# EAGLE board PanBatBoostAAA (EAGLE 7.0.0)
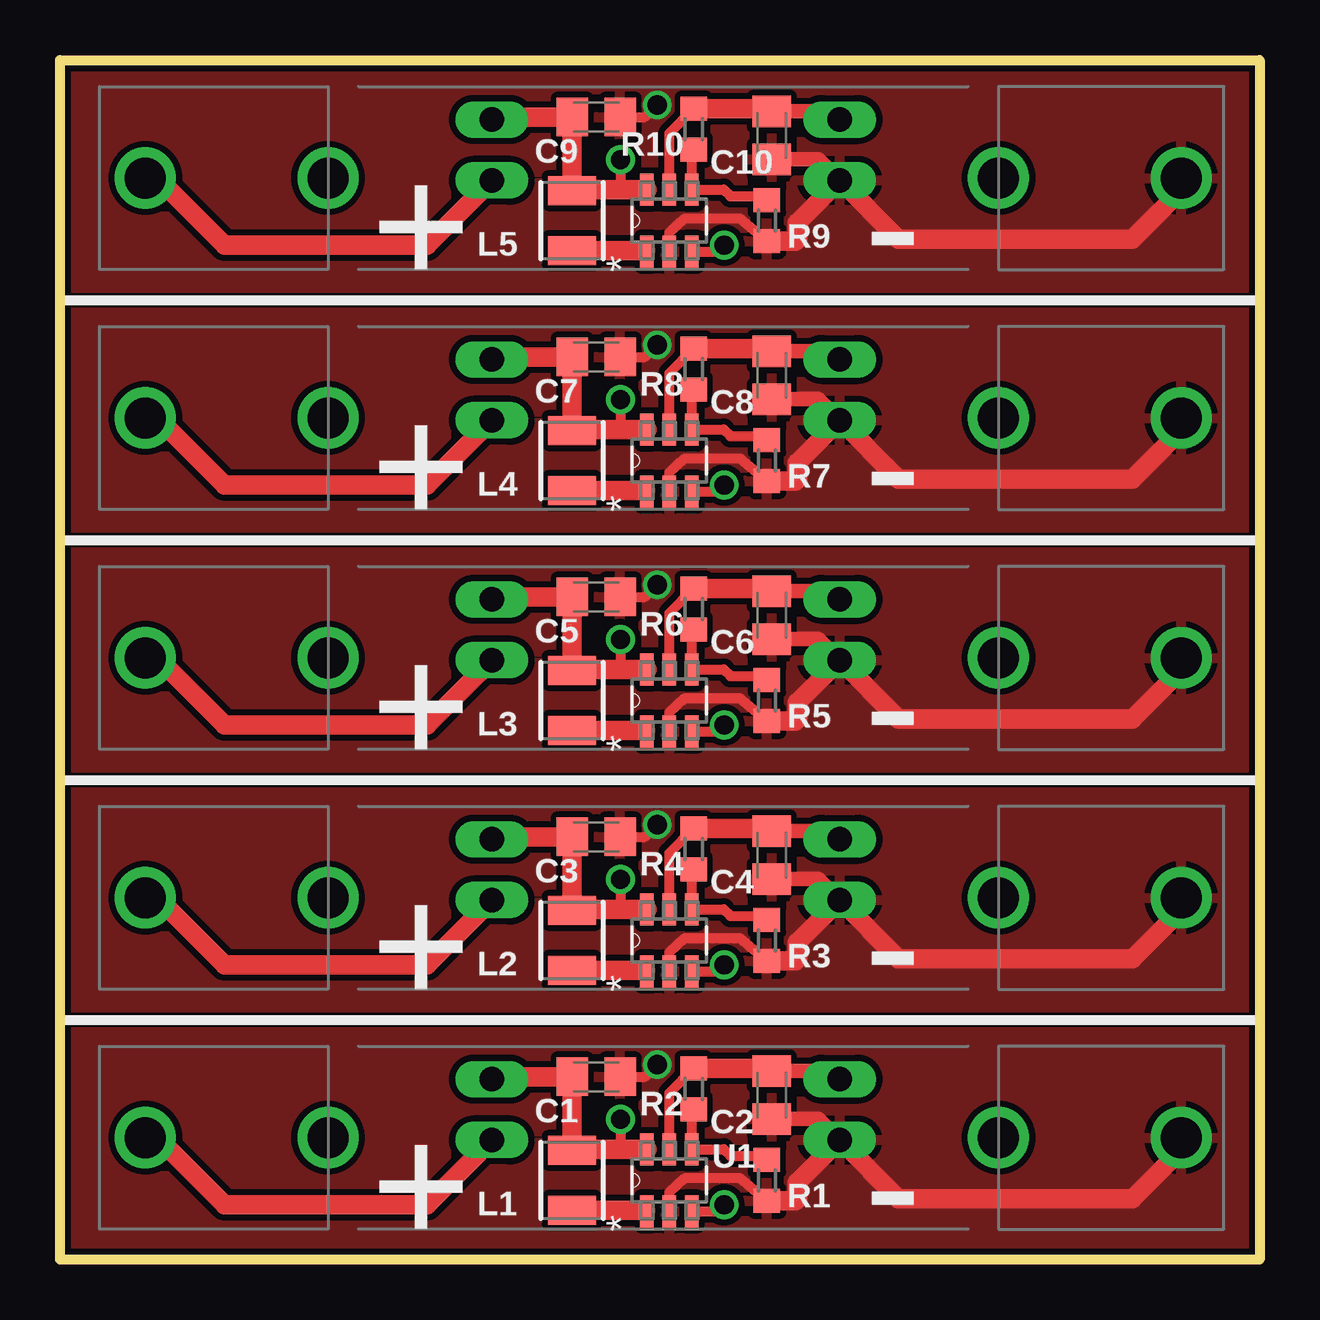
[diagram p0: board, top side]
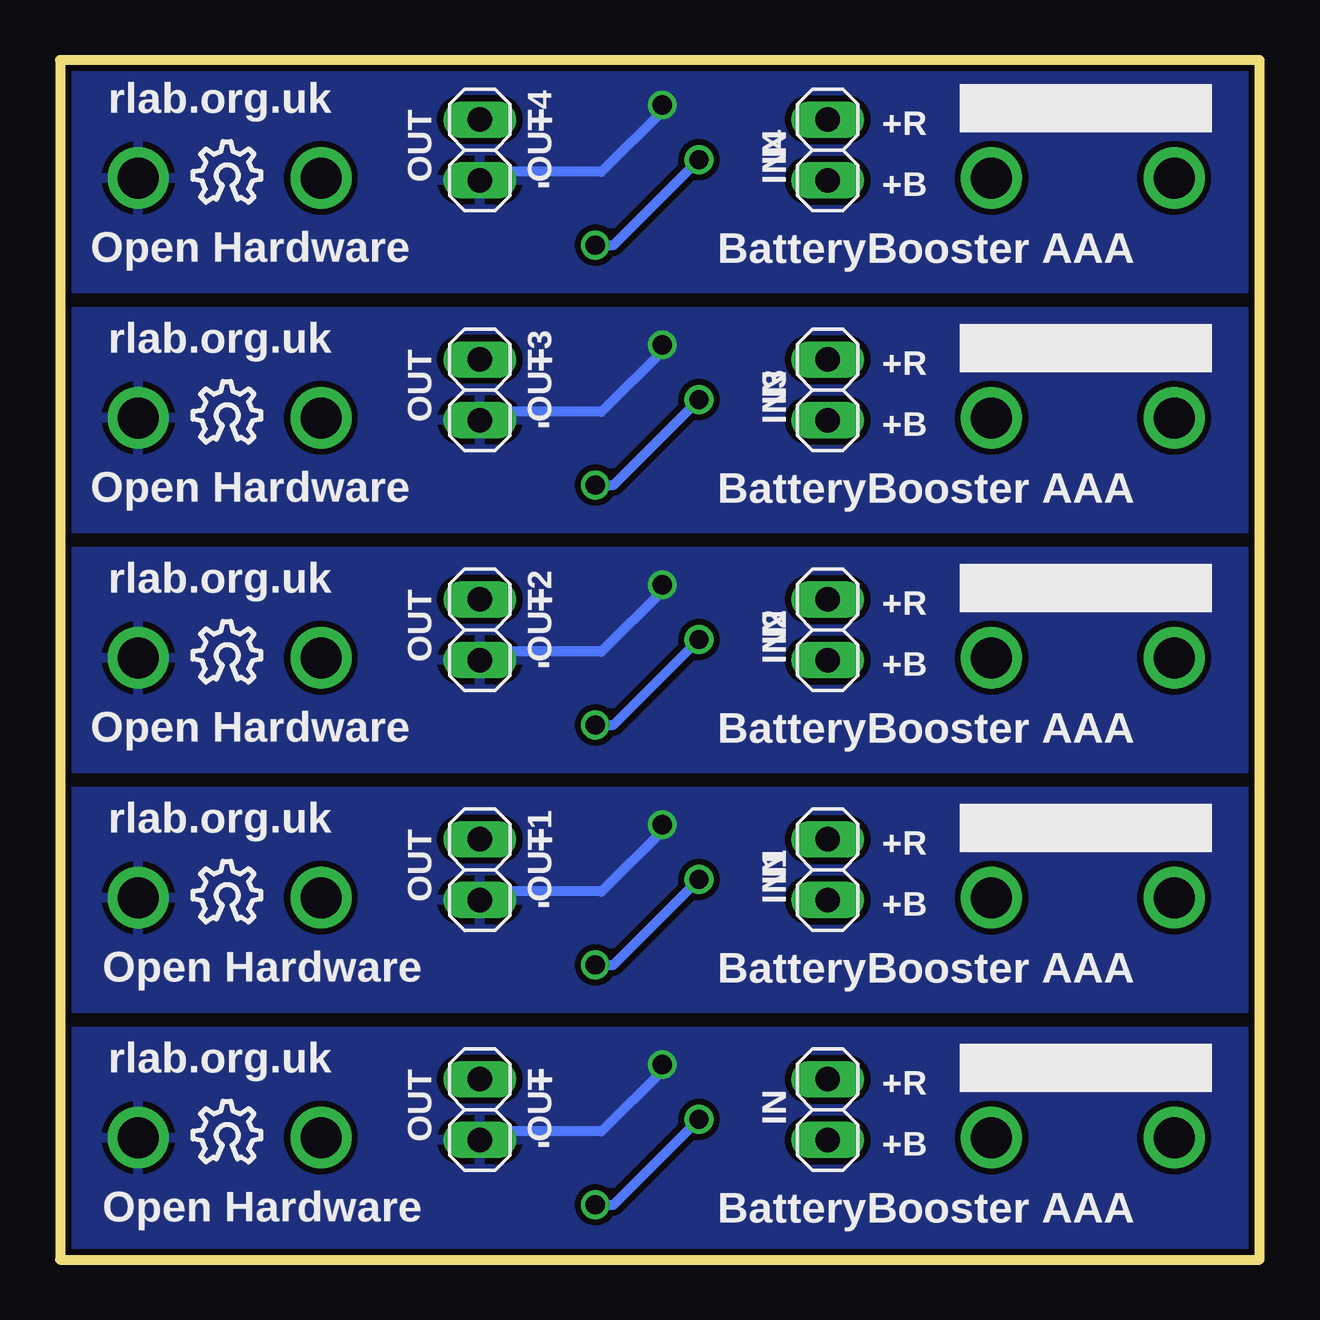
[diagram p1: board, bottom side, seen from below]

Size 50 x 50 mm. Coordinates in mm from the lower left corner, seen from the top.
Outline: 50,0 0,0 0,50 50,50 50,0
Copper layers (1*16): Top 0.035mm / dielectric 1.5mm / Bottom 0.035mm
Design rules "dirt_cheap_dirty_boards.v1 *": minimum track width 5mil, minimum drill 12mil, track to track 10mil, track to pad 10mil, pad to pad 10mil, via to via 10mil, smd to smd 0mil, copper to edge 10mil, drill to drill 10mil, minimum pad ring 10mil, minimum via ring 6mil, stop-mask expansion 2mil, vias tented up to drill 25mil, thermal gap 10mil

## Footprints (pad centres in the part's own frame; a part is rotated, then mirrored left to right if it is on the bottom)
BATTERY-AAA = drill 1.702: GND@1 21.59,0; GND@2 13.97,0; PWR@1 -21.59,0; PWR@2 -13.97,0
C0805K = smd 1.3 x 1.6: 1 -1,0; 2 1,0
1X02 = drill 1.016 long: 1 -1.27,0; 2 1.27,0
LQH32 = smd 1.2 x 2: 1 -1.25,0; 2 1.25,0
R0603 = smd 1 x 1.1: 1 -0.85,0; 2 0.85,0
SOT95P270X145-6N = smd 1.321 x 0.559: 1 -1.295,0.94; 2 -1.295,0; 3 -1.295,-0.94; 4 1.295,-0.94; 5 1.295,0; 6 1.295,0.94

## Placement (x,y rotation side)
BAT1  [BATTERY-AAA]  25.15,5.08 0 top
BAT2  [BATTERY-AAA]  25.15,15.08 0 top
BAT3  [BATTERY-AAA]  25.15,25.08 0 top
BAT4  [BATTERY-AAA]  25.15,35.08 0 top
BAT5  [BATTERY-AAA]  25.15,45.08 0 top
C1  [C0805K]  22.35,7.62 0 top
C2  [C0805K]  29.67,6.86 270 top
C3  [C0805K]  22.35,17.62 0 top
C4  [C0805K]  29.67,16.86 270 top
C5  [C0805K]  22.35,27.62 0 top
C6  [C0805K]  29.67,26.86 270 top
C7  [C0805K]  22.35,37.62 0 top
C8  [C0805K]  29.67,36.86 270 top
C9  [C0805K]  22.35,47.62 0 top
C10  [C0805K]  29.67,46.86 270 top
IN  [1X02]  18,6.25 270 bottom
IN1  [1X02]  18,16.25 270 bottom
IN2  [1X02]  18,26.25 270 bottom
IN3  [1X02]  18,36.25 270 bottom
IN4  [1X02]  18,46.25 270 bottom
L1  [LQH32]  21.34,3.3 270 top
L2  [LQH32]  21.34,13.3 270 top
L3  [LQH32]  21.34,23.3 270 top
L4  [LQH32]  21.34,33.3 270 top
L5  [LQH32]  21.34,43.3 270 top
OUT  [1X02]  32.5,6.25 90 bottom
OUT1  [1X02]  32.5,16.25 90 bottom
OUT2  [1X02]  32.5,26.25 90 bottom
OUT3  [1X02]  32.5,36.25 90 bottom
OUT4  [1X02]  32.5,46.25 90 bottom
R1  [R0603]  29.46,3.3 90 top
R2  [R0603]  26.42,7.11 90 top
R3  [R0603]  29.46,13.3 90 top
R4  [R0603]  26.42,17.11 90 top
R5  [R0603]  29.46,23.3 90 top
R6  [R0603]  26.42,27.11 90 top
R7  [R0603]  29.46,33.3 90 top
R8  [R0603]  26.42,37.11 90 top
R9  [R0603]  29.46,43.3 90 top
R10  [R0603]  26.42,47.11 90 top
U$1  MCP1640CT-I/CHY  [SOT95P270X145-6N]  25.4,3.3 90 top
U$2  [OSHW_8X100_NOTEXT]  44.45,4.06 0 bottom
U$3  MCP1640CT-I/CHY  [SOT95P270X145-6N]  25.4,13.3 90 top
U$4  [OSHW_8X100_NOTEXT]  44.45,14.06 0 bottom
U$5  MCP1640CT-I/CHY  [SOT95P270X145-6N]  25.4,23.3 90 top
U$6  [OSHW_8X100_NOTEXT]  44.45,24.06 0 bottom
U$7  MCP1640CT-I/CHY  [SOT95P270X145-6N]  25.4,33.3 90 top
U$8  [OSHW_8X100_NOTEXT]  44.45,34.06 0 bottom
U$9  MCP1640CT-I/CHY  [SOT95P270X145-6N]  25.4,43.3 90 top
U$10  [OSHW_8X100_NOTEXT]  44.45,44.06 0 bottom

## Library data of the parts
BAT1-BAT5 = SparkFun
C1-C10 R1-R10 = rcl
IN IN1-IN4 OUT OUT1-OUT4 = pinhead
L1-L5 = inductor
U$1 U$3 U$5 U$7 U$9 = MCP1640; MPN: MCP1640CT-I/CHY; OC_FARNELL: 1800208; OC_NEWARK: 73R3626; PACKAGE: SOT-6; SUPPLIER: Microchip
U$2 U$4 U$6 U$8 U$10 = ohw-logo

## Nets
GND: BAT1.GND@1 C1.2 C2.2 OUT.1 R1.1 U$1.2
GND1: BAT2.GND@1 C3.2 C4.2 OUT1.1 R3.1 U$3.2
GND2: BAT3.GND@1 C5.2 C6.2 OUT2.1 R5.1 U$5.2
GND3: BAT4.GND@1 C7.2 C8.2 OUT3.1 R7.1 U$7.2
GND4: BAT5.GND@1 C9.2 C10.2 OUT4.1 R9.1 U$9.2
N$1: C1.1 IN.1 L1.1 U$1.3 U$1.6
N$2: C2.1 OUT.2 R2.2 U$1.5
N$3: R1.2 R2.1 U$1.4
N$4: L1.2 U$1.1
N$5: BAT1.PWR@1 IN.2
N$6: C4.1 OUT1.2 R4.2 U$3.5
N$7: R3.2 R4.1 U$3.4
N$8: BAT2.PWR@1 IN1.2
N$9: C3.1 IN1.1 L2.1 U$3.3 U$3.6
N$10: L2.2 U$3.1
N$11: C6.1 OUT2.2 R6.2 U$5.5
N$12: R5.2 R6.1 U$5.4
N$13: BAT3.PWR@1 IN2.2
N$14: C5.1 IN2.1 L3.1 U$5.3 U$5.6
N$15: L3.2 U$5.1
N$16: C8.1 OUT3.2 R8.2 U$7.5
N$17: R7.2 R8.1 U$7.4
N$18: BAT4.PWR@1 IN3.2
N$19: C7.1 IN3.1 L4.1 U$7.3 U$7.6
N$20: L4.2 U$7.1
N$21: C10.1 OUT4.2 R10.2 U$9.5
N$22: R9.2 R10.1 U$9.4
N$23: BAT5.PWR@1 IN4.2
N$24: C9.1 IN4.1 L5.1 U$9.3 U$9.6
N$25: L5.2 U$9.1

## Tracks (layer width: path | path; a pad name or v marks a point on that pad's centre or on a via)
GND  (via drill 0.8)
  Top 0.406: 29.88,2.45 R1.1 28.34,3.4 26.06,3.4 25.4,2.79 U$1.2 | C2.2 29.46,5.84 | C1.2 24.38,7.62 v24.89,8.13
  Top 0.61: C2.2 31.62,5.86 OUT.1
  Top 0.813: 29.88,2.45 30.65,2.45 30.73,2.54 30.73,3.21 OUT.1 34.94,2.54 44.7,2.54 46.74,4.57 BAT1.GND@1
  Bottom 0.406: v24.89,8.13 24.89,7.87 27.43,5.33 32.15,5.33 OUT.1
  pour Bottom: 0.5,0.5 0.5,9.5 49.5,9.5 49.5,0.5
  pour Top: 0.5,0.5 0.5,9.5 49.5,9.5 49.5,0.5
GND1  (via drill 0.8)
  Top 0.406: 29.88,12.45 R3.1 28.34,13.4 26.06,13.4 25.4,12.79 U$3.2 | C4.2 29.46,15.84 | C3.2 24.38,17.62 v24.89,18.13
  Top 0.61: C4.2 31.62,15.86 OUT1.1
  Top 0.813: 29.88,12.45 30.65,12.45 30.73,12.54 30.73,13.21 OUT1.1 34.94,12.54 44.7,12.54 46.74,14.57 BAT2.GND@1
  Bottom 0.406: v24.89,18.13 24.89,17.87 27.43,15.33 32.15,15.33 OUT1.1
  pour Bottom: 0.5,10.5 0.5,19.5 49.5,19.5 49.5,10.5
  pour Top: 0.5,10.5 0.5,19.5 49.5,19.5 49.5,10.5
GND2  (via drill 0.8)
  Top 0.406: 29.88,22.45 R5.1 28.34,23.4 26.06,23.4 25.4,22.79 U$5.2 | C6.2 29.46,25.84 | C5.2 24.38,27.62 v24.89,28.13
  Top 0.61: C6.2 31.62,25.86 OUT2.1
  Top 0.813: 29.88,22.45 30.65,22.45 30.73,22.54 30.73,23.21 OUT2.1 34.94,22.54 44.7,22.54 46.74,24.57 BAT3.GND@1
  Bottom 0.406: v24.89,28.13 24.89,27.87 27.43,25.33 32.15,25.33 OUT2.1
  pour Bottom: 0.5,20.5 0.5,29.5 49.5,29.5 49.5,20.5
  pour Top: 0.5,20.5 0.5,29.5 49.5,29.5 49.5,20.5
GND3  (via drill 0.8)
  Top 0.406: 29.88,32.45 R7.1 28.34,33.4 26.06,33.4 25.4,32.79 U$7.2 | C8.2 29.46,35.84 | C7.2 24.38,37.62 v24.89,38.13
  Top 0.61: C8.2 31.62,35.86 OUT3.1
  Top 0.813: 29.88,32.45 30.65,32.45 30.73,32.54 30.73,33.21 OUT3.1 34.94,32.54 44.7,32.54 46.74,34.57 BAT4.GND@1
  Bottom 0.406: v24.89,38.13 24.89,37.87 27.43,35.33 32.15,35.33 OUT3.1
  pour Bottom: 0.5,30.5 0.5,39.5 49.5,39.5 49.5,30.5
  pour Top: 0.5,30.5 0.5,39.5 49.5,39.5 49.5,30.5
GND4  (via drill 0.8)
  Top 0.406: 29.88,42.45 R9.1 28.34,43.4 26.06,43.4 25.4,42.79 U$9.2 | C10.2 29.46,45.84 | C9.2 24.38,47.62 v24.89,48.13
  Top 0.61: C10.2 31.62,45.86 OUT4.1
  Top 0.813: 29.88,42.45 30.65,42.45 30.73,42.54 30.73,43.21 OUT4.1 34.94,42.54 44.7,42.54 46.74,44.57 BAT5.GND@1
  Bottom 0.406: v24.89,48.13 24.89,47.87 27.43,45.33 32.15,45.33 OUT4.1
  pour Bottom: 0.5,40.5 0.5,49.5 49.5,49.5 49.5,40.5
  pour Top: 0.5,40.5 0.5,49.5 49.5,49.5 49.5,40.5
N$1  (via drill 0.8)
  Top 0.406: U$1.3 27.41,2.01 v27.69,2.29 | v23.37,5.84 23.37,4.85 23.11,4.6
  Top 0.813: U$1.6 23.11,4.6 21.38,4.6 L1.1 21.34,7.6 C1.1 18.1,7.62 IN.1
  Bottom 0.406: v27.69,2.29 26.92,2.29 v23.37,5.84
N$2
  Top 0.406: U$1.5 25.4,6.95 R2.2 | 29.36,7.96 C2.1
  Top 0.61: C2.1 32.16,7.86 OUT.2
  Top 0.813: R2.2 29.36,7.96
N$3
  Top 0.406: R2.1 26.34,6.19 U$1.4 27.66,4.6 27.94,4.32 29.3,4.32 R1.2
N$4
  Top 0.406: 24.41,2.05 U$1.1
  Top 0.813: L1.2 24.41,2.05
N$5
  Top 0.813: BAT1.PWR@1 4.06,5.08 6.86,2.29 15.31,2.29 IN.2
N$6
  Top 0.406: U$3.5 25.4,16.95 R4.2 | 29.36,17.96 C4.1
  Top 0.61: C4.1 32.16,17.86 OUT1.2
  Top 0.813: R4.2 29.36,17.96
N$7
  Top 0.406: R4.1 26.34,16.19 U$3.4 27.66,14.6 27.94,14.32 29.3,14.32 R3.2
N$8
  Top 0.813: BAT2.PWR@1 4.06,15.08 6.86,12.29 15.31,12.29 IN1.2
N$9  (via drill 0.8)
  Top 0.406: U$3.3 27.41,12.01 v27.69,12.29 | v23.37,15.84 23.37,14.85 23.11,14.6
  Top 0.813: U$3.6 23.11,14.6 21.38,14.6 L2.1 21.34,17.6 C3.1 18.1,17.62 IN1.1
  Bottom 0.406: v27.69,12.29 26.92,12.29 v23.37,15.84
N$10
  Top 0.406: 24.41,12.05 U$3.1
  Top 0.813: L2.2 24.41,12.05
N$11
  Top 0.406: U$5.5 25.4,26.95 R6.2 | 29.36,27.96 C6.1
  Top 0.61: C6.1 32.16,27.86 OUT2.2
  Top 0.813: R6.2 29.36,27.96
N$12
  Top 0.406: R6.1 26.34,26.19 U$5.4 27.66,24.6 27.94,24.32 29.3,24.32 R5.2
N$13
  Top 0.813: BAT3.PWR@1 4.06,25.08 6.86,22.29 15.31,22.29 IN2.2
N$14  (via drill 0.8)
  Top 0.406: U$5.3 27.41,22.01 v27.69,22.29 | v23.37,25.84 23.37,24.85 23.11,24.6
  Top 0.813: U$5.6 23.11,24.6 21.38,24.6 L3.1 21.34,27.6 C5.1 18.1,27.62 IN2.1
  Bottom 0.406: v27.69,22.29 26.92,22.29 v23.37,25.84
N$15
  Top 0.406: 24.41,22.05 U$5.1
  Top 0.813: L3.2 24.41,22.05
N$16
  Top 0.406: U$7.5 25.4,36.95 R8.2 | 29.36,37.96 C8.1
  Top 0.61: C8.1 32.16,37.86 OUT3.2
  Top 0.813: R8.2 29.36,37.96
N$17
  Top 0.406: R8.1 26.34,36.19 U$7.4 27.66,34.6 27.94,34.32 29.3,34.32 R7.2
N$18
  Top 0.813: BAT4.PWR@1 4.06,35.08 6.86,32.29 15.31,32.29 IN3.2
N$19  (via drill 0.8)
  Top 0.406: U$7.3 27.41,32.01 v27.69,32.29 | v23.37,35.84 23.37,34.85 23.11,34.6
  Top 0.813: U$7.6 23.11,34.6 21.38,34.6 L4.1 21.34,37.6 C7.1 18.1,37.62 IN3.1
  Bottom 0.406: v27.69,32.29 26.92,32.29 v23.37,35.84
N$20
  Top 0.406: 24.41,32.05 U$7.1
  Top 0.813: L4.2 24.41,32.05
N$21
  Top 0.406: U$9.5 25.4,46.95 R10.2 | 29.36,47.96 C10.1
  Top 0.61: C10.1 32.16,47.86 OUT4.2
  Top 0.813: R10.2 29.36,47.96
N$22
  Top 0.406: R10.1 26.34,46.19 U$9.4 27.66,44.6 27.94,44.32 29.3,44.32 R9.2
N$23
  Top 0.813: BAT5.PWR@1 4.06,45.08 6.86,42.29 15.31,42.29 IN4.2
N$24  (via drill 0.8)
  Top 0.406: U$9.3 27.41,42.01 v27.69,42.29 | v23.37,45.84 23.37,44.85 23.11,44.6
  Top 0.813: U$9.6 23.11,44.6 21.38,44.6 L5.1 21.34,47.6 C9.1 18.1,47.62 IN4.1
  Bottom 0.406: v27.69,42.29 26.92,42.29 v23.37,45.84
N$25
  Top 0.406: 24.41,42.05 U$9.1
  Top 0.813: L5.2 24.41,42.05

## Text on the board
bPlace: rlab.org.uk | +R | + | +B | - | BatteryBooster AAA | Open Hardware | rlab.org.uk | +R | + | +B | - | BatteryBooster AAA | Open Hardware | rlab.org.uk | +R | + | +B | - | BatteryBooster AAA | Open Hardware | rlab.org.uk | +R | + | +B | - | BatteryBooster AAA | Open Hardware | rlab.org.uk | +R | + | +B | - | BatteryBooster AAA | Open Hardware
tNames: U1
_tNames: R2 | C1 | C2 | R1 | L1 | R2 | C1 | C2 | R1 | L1 | R2 | C1 | C2 | R1 | L1 | R2 | C1 | C2 | R1 | L1 | R2 | C1 | C2 | R1 | L1
_bNames: IN | OUT | IN | OUT | IN | OUT | IN | OUT | IN | OUT